# EAGLE board nixie_paneralized (EAGLE 9.1.3)
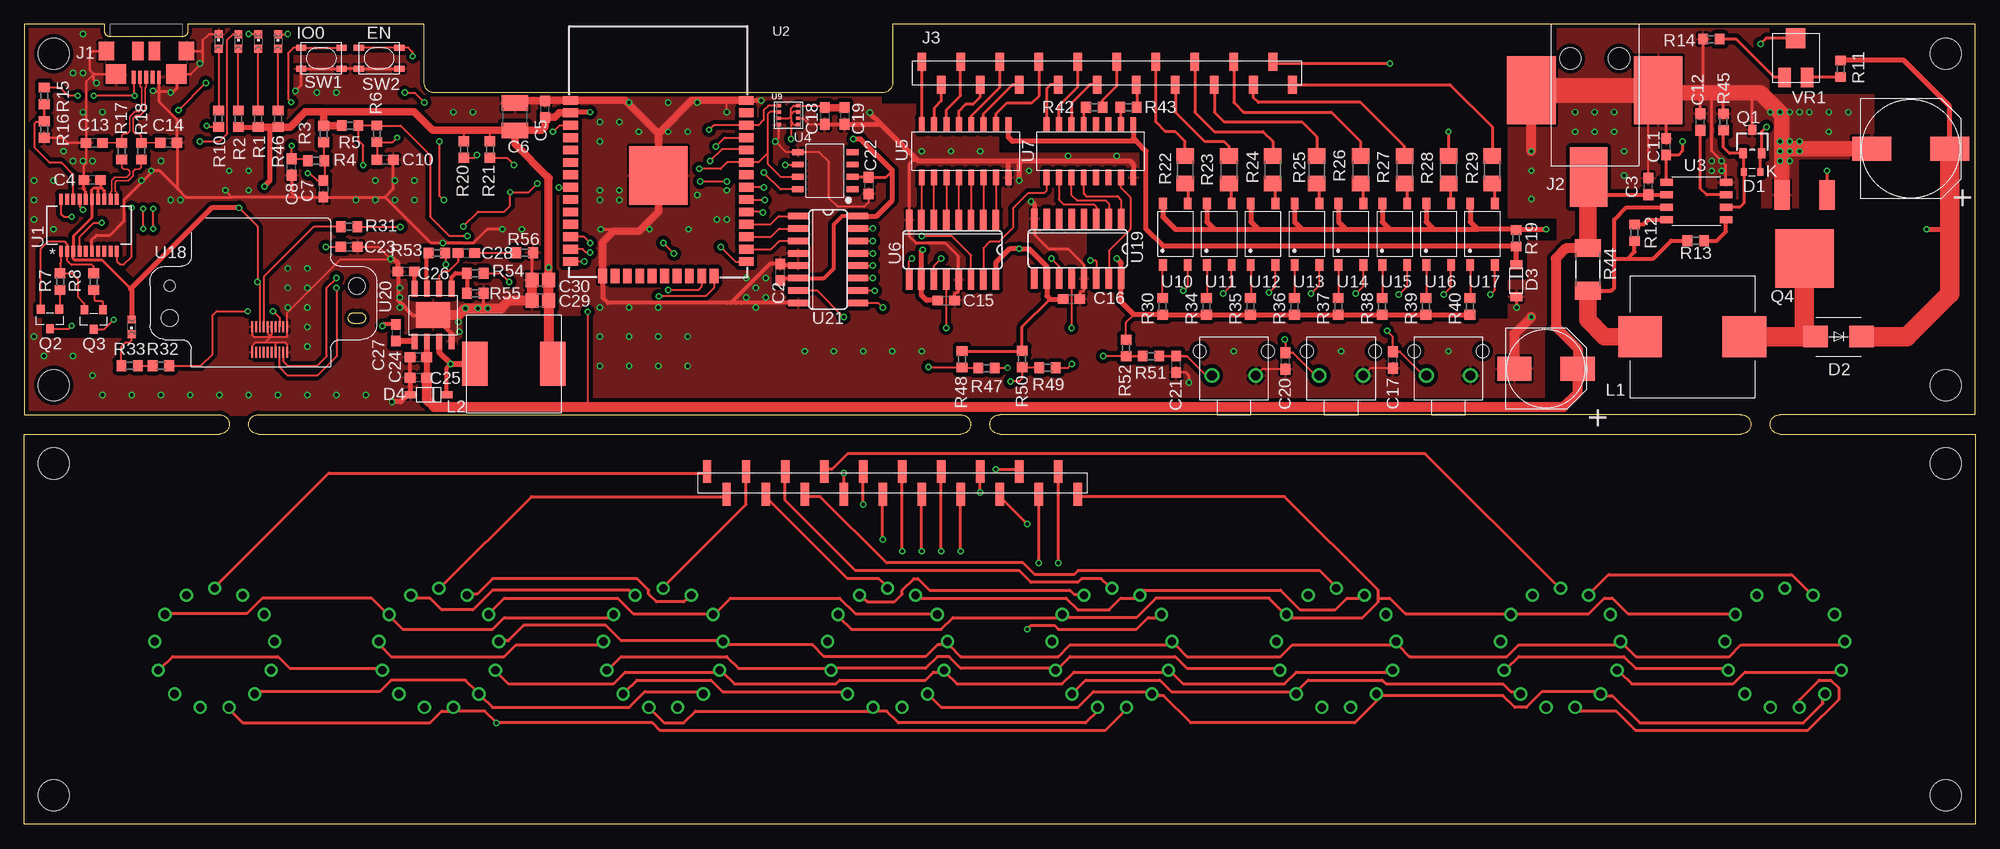
[diagram p0: board, top side]
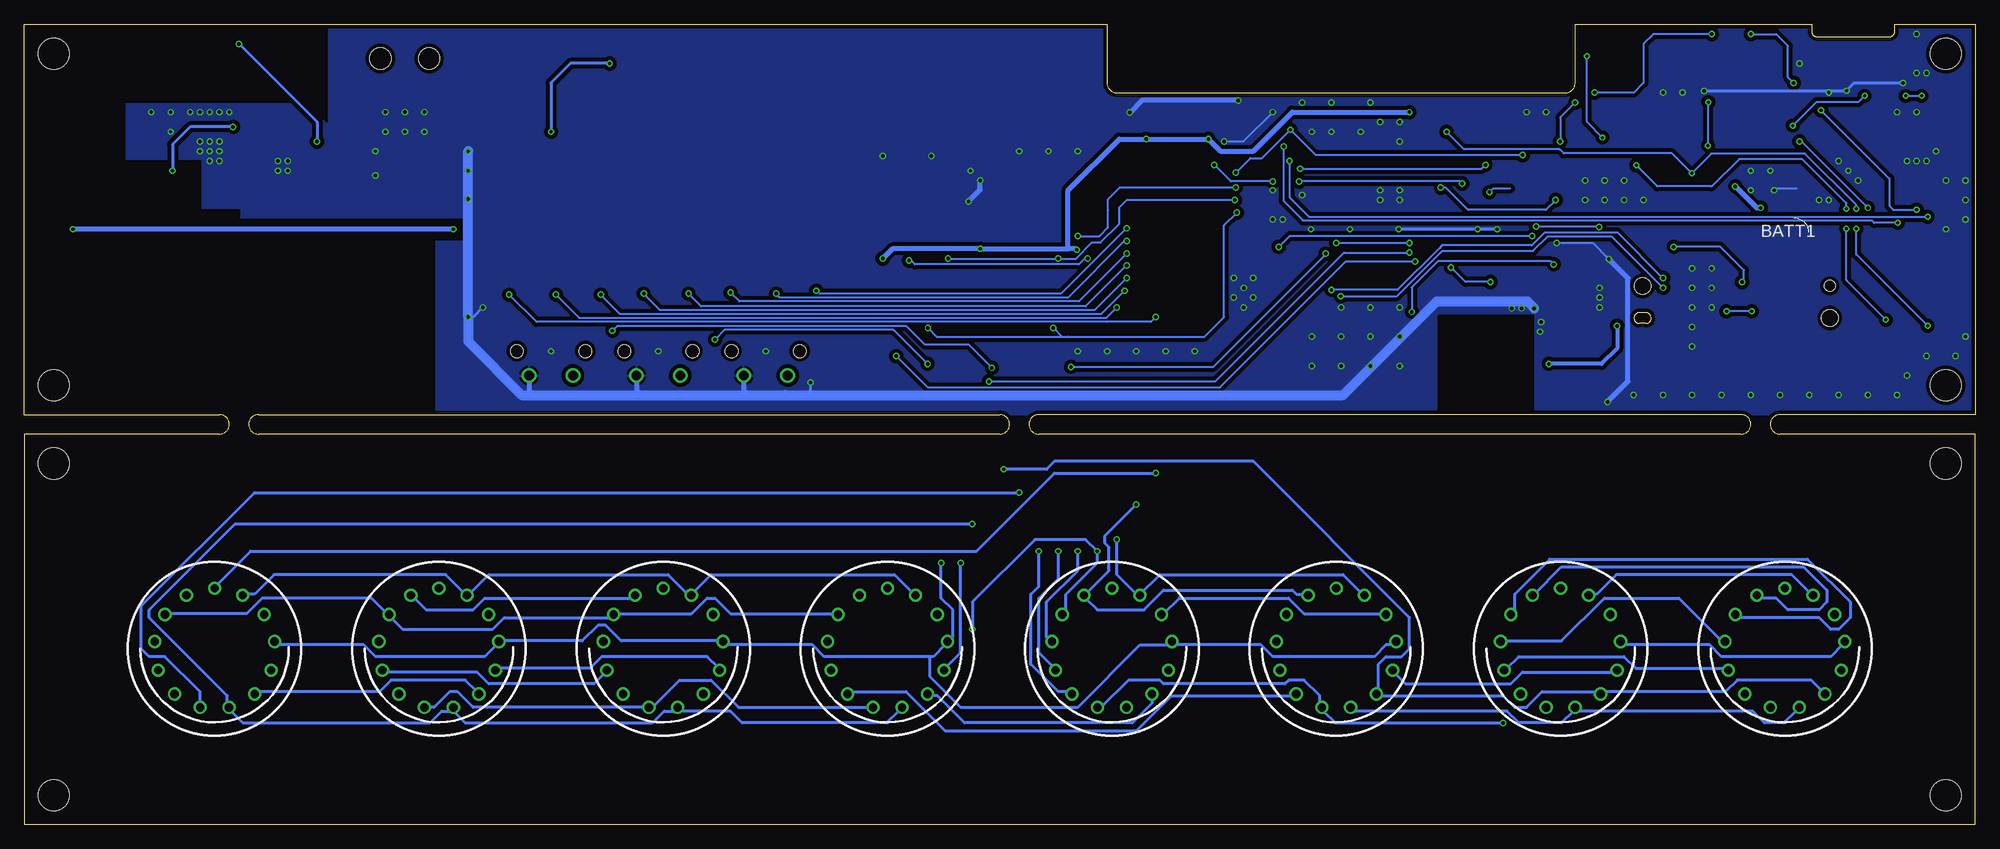
[diagram p1: board, bottom side, seen from below]

Size 200 x 82 mm. Coordinates in mm from the lower left corner, seen from the top.
Outline: 200,0 0,0 0,40 20,40 arc180 20,42 0,42 0,82 8.25,82 8.25,81.25 arc90 8.75,80.75 16.25,80.75 arc90 16.75,81.25 16.75,82 41,82 41,76 arc90 42,75 88,75 arc90 89,76 89,82 200,82 200,42 180,42 arc180 180,40 200,40 200,0
Outline: 24,40 arc-180 24,42 96,42 arc-180 96,40 24,40
Outline: 100,40 arc-180 100,42 176,42 arc-180 176,40 100,40
Copper layers (1*16): Top 0.035mm / dielectric 1.5mm / Bottom 0.035mm
Design rules "Elecrow_2-layer_eagle_rule": minimum track width 6mil, minimum drill 12mil, track to track 6mil, track to pad 6mil, pad to pad 6mil, via to via 6mil, smd to smd 0mil, copper to edge 10mil, drill to drill 10mil, minimum pad ring 10mil, minimum via ring 6mil, stop-mask expansion 2mil, vias tented up to drill 100mil, thermal gap 10mil
Net classes: 0 default: width 0.152 mm; 1 POWER: width 0.254 mm; 2 diffrencial pair: width 0.15 mm, clearance 0.3 mm to class 0, clearance 0.3 mm to class 1, clearance 0.15 mm
Holes 3.2 mm at 197,37 197,3 3,3 3,37 3,79 3,45 197,79 197,45

## Footprints (pad centres in the part's own frame; a part is rotated, then mirrored left to right if it is on the bottom)
NICHICON-ALMINUM-CAPACITOR-8MM = smd 2.5 x 3.5: NEG 0,-3.25; POS 0,3.25
C0603 = smd 1.1 x 1: 1 -0.85,0; 2 0.85,0
C1210 = smd 1.6 x 2.7: 1 -1.4,0; 2 1.4,0
NICHICON-ALMINUM-CAPACITOR-10MM = smd 2.5 x 4: NEG 0,-4; POS 0,4
C2012 = smd 1.3 x 1.5: 1 -0.85,0; 2 0.85,0
EMD2 = smd 0.6 x 0.8: A -0.85,0; K 0.85,0
MKT-DO214AA = smd 2.5 x 2.2: A -2.35,0; K 2.35,0
SOD123 = smd 0.91 x 1.22: A -1.635,0; K 1.635,0
DIODE-ZETEX-SOD123 = smd 1.2 x 0.7: A -1.85,0; K 1.85,0
ZX62R-B-5PA = smd 0.4 x 1.35: D+ 0,2.675; D- 0.65,2.675; GND -1.3,2.675; ID -0.65,2.675; VCC 1.3,2.675 | smd 1.2 x 1.9: NC@1 -0.85,0; NC@2 0.85,0 | smd 2.1 x 2: SHIELD@1 -3.1,2.35; SHIELD@2 3.1,2.35 | smd 1.6 x 1.9: SHIELD@3 -4.1,0; SHIELD@4 4.1,0
2DC-0415D200 = smd 6.1 x 3.8: 1 15.65,-0.63 | smd 7 x 5: 2 6.75,6.5; 3 6.75,-6.5 | hole 2.2: 3.5,2.5; 3.5,-2.5
FSM-21045-20 = smd 0.89 x 1.85: 1 0,1.175; 2 2,-1.175; 3 4,1.175; 4 6,-1.175; 5 8,1.175; 6 10,-1.175; 7 12,1.175; 8 14,-1.175; 9 16,1.175; 10 18,-1.175; 11 20,1.175; 12 22,-1.175; 13 24,1.175; 14 26,-1.175; 15 28,1.175; 16 30,-1.175; 17 32,1.175; 18 34,-1.175; 19 36,1.175; 20 38,-1.175
PSM-210223 = smd 0.85 x 2.35: 1 0,1.175; 2 2,-1.175; 3 4,1.175; 4 6,-1.175; 5 8,1.175; 6 10,-1.175; 7 12,1.175; 8 14,-1.175; 9 16,1.175; 10 18,-1.175; 11 20,1.175; 12 22,-1.175; 13 24,1.175; 14 26,-1.175; 15 28,1.175; 16 30,-1.175; 17 32,1.175; 18 34,-1.175; 19 36,1.175; 20 38,-1.175
CLF12577NI-D = smd 4.5 x 4.2: 1 -5.35,0; 2 5.35,0
NR10050T100M = smd 2.6 x 4.5: P$1 -4,0; P$2 4,0
CHIPLED_0603 = smd 0.8 x 0.8: A 0,-0.75; C 0,0.75
IN-14 = drill 0.84: 0 5.094,-3.516; 1 -5.094,-3.516; 2 -6.145,-0.746; 3 -5.788,2.195; 4 -4.105,4.633; 5 -1.481,6.01; 6 1.481,6.01; 7 4.105,4.633; 8 5.788,2.195; 9 6.145,-0.746; A 0,-6.19; LHDP 2.877,-5.481; RHDP -2.877,-5.481
SOT346 = smd 0.8 x 1: 1 -0.95,-1.2; 2 0.95,-1.2; 3 0,1.2
SOT23 = smd 0.8 x 0.9: B -0.95,-1; C 0,1; E 0.95,-1
2-7K1A = smd 6 x 6: D 0,4 | smd 1.6 x 3: G -2.3,-2.5; S 2.3,-2.5
R0603 = smd 1 x 1.1: 1 -0.85,0; 2 0.85,0
R3216 = smd 1.6 x 1.8: 1 -1.4,0; 2 1.4,0
R5025 = smd 1.8 x 2.7: 1 -2.2,0; 2 2.2,0
SKRPACE010 = smd 1.05 x 0.65: P1 -2.075,-1.075; P2 2.075,-1.075; S1 -2.075,1.075; S2 2.075,1.075
SKHHLPA010 = drill 1: 1 2.25,0; 2 -2.25,0 | hole 1.3: -3.5,2.5; 3.5,2.5
SSOP20_L = smd 0.4 x 1.143: 1 -2.857,-2.68; 2 -2.223,-2.68; 3 -1.587,-2.68; 4 -0.953,-2.68; 5 -0.318,-2.68; 6 0.318,-2.68; 7 0.953,-2.68; 8 1.587,-2.68; 9 2.223,-2.68; 10 2.857,-2.68; 11 2.857,2.68; 12 2.223,2.68; 13 1.587,2.68; 14 0.953,2.68; 15 0.318,2.68; 16 -0.318,2.68; 17 -0.953,2.68; 18 -1.587,2.68; 19 -2.223,2.68; 20 -2.857,2.68
ESP-WROOM-32 = smd 0.9 x 1.5: 1 7.7,9; 2 6.43,9; 3 5.16,9; 4 3.89,9; 5 2.62,9; 6 1.35,9; 7 0.08,9; 8 -1.19,9; 9 -2.46,9; 10 -3.73,9; 11 -5,9; 12 -6.27,9; 13 -7.54,9; 14 -8.81,9; 25 -8.81,-9; 26 -7.54,-9; 27 -6.27,-9; 28 -5,-9; 29 -3.73,-9; 30 -2.46,-9; 31 -1.19,-9; 32 0.08,-9; 33 1.35,-9; 34 2.62,-9; 35 3.89,-9; 36 5.16,-9; 37 6.43,-9; 38 7.7,-9 | smd 1.5 x 0.9: 15 -10.3,5.715; 16 -10.3,4.445; 17 -10.3,3.175; 18 -10.3,1.905; 19 -10.3,0.635; 20 -10.3,-0.635; 21 -10.3,-1.905; 22 -10.3,-3.175; 23 -10.3,-4.445; 24 -10.3,-5.715 | smd 6 x 6: GND 0,0
DMP8 = smd 1.27 x 0.72: 1 -3.05,1.905; 2 -3.05,0.635; 3 -3.05,-0.635; 4 -3.05,-1.905; 5 3.05,-1.905; 6 3.05,-0.635; 7 3.05,0.635; 8 3.05,1.905
SO08 = smd 0.6 x 1.2: 1 -1.905,-2.8; 2 -0.635,-2.8; 3 0.635,-2.8; 4 1.905,-2.8; 5 1.905,2.8; 6 0.635,2.8; 7 -0.635,2.8; 8 -1.905,2.8
R-PDSO-G16 = smd 0.6 x 1.55: 1 0,-2.7; 2 1.27,-2.7; 3 2.54,-2.7; 4 3.81,-2.7; 5 5.08,-2.7; 6 6.35,-2.7; 7 7.62,-2.7; 8 8.89,-2.7; 9 8.89,2.7; 10 7.62,2.7; 11 6.35,2.7; 12 5.08,2.7; 13 3.81,2.7; 14 2.54,2.7; 15 1.27,2.7; 16 0,2.7
SO16 = smd 0.66 x 2.032: 1 -4.445,-3.073; 2 -3.175,-3.073; 3 -1.905,-3.073; 4 -0.635,-3.073; 5 0.635,-3.073; 6 1.905,-3.073; 7 3.175,-3.073; 8 4.445,-3.073; 9 4.445,3.073; 10 3.175,3.073; 11 1.905,3.073; 12 0.635,3.073; 13 -0.635,3.073; 14 -1.905,3.073; 15 -3.175,3.073; 16 -4.445,3.073
LGA-8-2.5X2.5 = smd 0.35 x 0.5: 1 -0.975,1.025; 2 -0.325,1.025; 3 0.325,1.025; 4 0.975,1.025; 5 0.975,-1.025; 6 0.325,-1.025; 7 -0.325,-1.025; 8 -0.975,-1.025
11-4M1S = smd 1.2 x 0.8: 1 -3.15,1.27; 3 -3.15,-1.27; 4 3.15,-1.27; 6 3.15,1.27
GYSFDMAXB = smd 0.2 x 1.14: 1 12.05,-6.82; 2 12.05,-4.18; 3 11.65,-6.82; 4 11.65,-4.18; 5 11.25,-6.82; 6 11.25,-4.18; 7 10.85,-6.82; 8 10.85,-4.18; 9 10.45,-6.82; 10 10.45,-4.18; 11 10.05,-6.82; 12 10.05,-4.18; 13 9.65,-6.82; 14 9.65,-4.18; 15 9.25,-6.82; 16 9.25,-4.18; 17 8.85,-6.82; 18 8.85,-4.18; 19 8.45,-6.82; 20 8.45,-4.18 | hole 1.1: 0,0 | hole 1.7: 0,-3.3; 19.2,0
MP2307 = smd 0.61 x 1.6: 1 -1.905,-2.7; 2 -0.635,-2.7; 3 0.635,-2.7; 4 1.905,-2.7; 5 1.905,2.7; 6 0.635,2.7; 7 -0.635,2.7; 8 -1.905,2.7 | smd 3.51 x 2.62: PAD 0,0
SM-42A = smd 1.3 x 2: 1 1.15,-2; 3 -1.15,-2 | smd 2 x 2: 2 0,2

## Placement (x,y rotation side)
C1  UWT1E221MNL1GS  [NICHICON-ALMINUM-CAPACITOR-8MM]  156,46.7 270 top
C2  0.1uF  [C0603]  77.5,56.6 90 top
C3  0.1uF  [C0603]  166.5,65.4 90 top
C4  0.1uF  [C0603]  6.96,66.05 180 top
C5  0.1uF  [C0603]  53.39,73.31 90 top
C6  100uF  [C1210]  50.3,72.53 90 top
C7  1000pF  [C0603]  30.66,65.15 270 top
C8  1000pF  [C0603]  27.4,67.38 90 top
C9  ULR2D330MML1GS  [NICHICON-ALMINUM-CAPACITOR-10MM]  193.4,69.25 270 top
C10  1000pF  [C0603]  36.98,68.12 180 top
C11  0.1uF  [C0603]  168.32,69.45 90 top
C12  330pF  [C0603]  171.83,72 90 top
C13  47pF  [C0603]  7.17,69.85 180 top
C14  47pF  [C0603]  14.81,69.87 0 top
C15  0.1uF  [C0603]  94.5,53.7 0 top
C16  0.1uF  [C0603]  107.36,53.85 0 top
C17  1000pF  [C0603]  140.3,47.6 90 top
C18  0.1uF  [C0603]  82.05,72.62 270 top
C19  0.1uF  [C0603]  84.09,72.62 270 top
C20  1000pF  [C0603]  129.3,47.5 90 top
C21  1000pF  [C0603]  118.09,47.17 90 top
C22  0.1uF  [C0603]  86.56,65.47 270 top
C23  0.1uF  [C0603]  33.3,59.2 0 top
C24  10uF  [C0603]  40.4,47.87 180 top
C25  10uF  [C0603]  40.4,45.79 180 top
C26  0.1uF  [C0603]  39.15,56.66 180 top
C27  10nF  [C0603]  38.1,50.4 270 top
C28  3.9nF  [C0603]  45.31,58.57 0 top
C29  22μF  [C2012]  52.9,53.7 180 top
C30  22μF  [C2012]  52.9,55.8 180 top
D1  1SS400SM  [EMD2]  177.13,66.87 0 top
D2  S2MS2M  [MKT-DO214AA]  186,50 0 top
D3  MMSZ5267BT1G  [SOD123]  152.95,55.71 90 top
D4  B130LAW-7-F  [DIODE-ZETEX-SOD123]  41.45,44.03 0 top
J1  ZX62R-AB-5P  [ZX62R-B-5PA]  12.5,79.25 180 top
J2  2DC-0415D200  [2DC-0415D200]  161,82 270 top
J3  FSM-21045-20  [FSM-21045-20]  92,77 0 top
J4  PSM-210223  [PSM-210223]  108,35 180 top
L1  CLF12577NIT-221M-D  [CLF12577NI-D]  171,50 0 top
L2  NR10050T100M  [NR10050T100M]  50.2,47.2 0 top
LED1  RX  [CHIPLED_0603]  23.98,80.25 0 top
LED2  TX  [CHIPLED_0603]  21.95,80.25 0 top
LED3  VBUS  [CHIPLED_0603]  19.91,80.26 0 top
LED5  GPS  [CHIPLED_0603]  11,51 180 top
LED6  LED1  [CHIPLED_0603]  26.01,80.25 0 top
N1  IN-14  [IN-14]  180.5,18 180 bottom
N2  IN-14  [IN-14]  157.5,18 180 bottom
N3  IN-14  [IN-14]  134.5,18 180 bottom
N4  IN-14  [IN-14]  111.5,18 180 bottom
N5  IN-14  [IN-14]  88.5,18 180 bottom
N6  IN-14  [IN-14]  65.5,18 180 bottom
N7  IN-14  [IN-14]  42.5,18 180 bottom
N8  IN-14  [IN-14]  19.5,18 180 bottom
Q1  2SA1162  [SOT346]  177.16,69.99 0 top
Q2  MMSS8050-L  [SOT23]  2.63,51.79 180 top
Q3  MMSS8050-L  [SOT23]  7.1,51.74 180 top
Q4  TK7P50D  [2-7K1A]  182.5,62 180 top
R1  1k  [R0603]  23.98,72.32 270 top
R2  1k  [R0603]  21.95,72.32 270 top
R3  10k  [R0603]  30.68,70.76 90 top
R4  470  [R0603]  29.92,68.02 0 top
R5  10k  [R0603]  33.4,71.62 180 top
R6  470  [R0603]  36.14,70.79 90 top
R7  10k  [R0603]  3.66,55.63 90 top
R8  10k  [R0603]  7.11,55.63 90 top
R10  1k  [R0603]  19.91,72.34 270 top
R11  [R0603]  186.21,77.45 90 top
R12  470  [R0603]  165.08,60.65 270 top
R13  1k  [R0603]  171.35,59.83 180 top
R14  [R0603]  172.95,80.49 0 top
R15  4.7k  [R0603]  2.03,74.67 90 top
R16  10k  [R0603]  2.03,71.22 90 top
R17  27  [R0603]  9.97,69 270 top
R18  27  [R0603]  12,69 270 top
R19  220k  [R0603]  152.94,60.09 90 top
R20  4.7k  [R0603]  45.07,69.18 90 top
R21  4.7k  [R0603]  47.73,69.18 90 top
R22  10k  [R3216]  119,67.1 90 top
R23  10k  [R3216]  123.5,67.1 90 top
R24  10k  [R3216]  128,67.1 90 top
R25  10k  [R3216]  132.5,67.1 90 top
R26  10k  [R3216]  137,67.1 90 top
R27  10k  [R3216]  141.5,67.1 90 top
R28  10k  [R3216]  146,67.1 90 top
R29  10k  [R3216]  150.5,67.1 90 top
R30  1k  [R0603]  116.7,53.1 90 top
R31  0  [R0603]  33.3,61.25 0 top
R32  1k  [R0603]  14,47 0 top
R33  0  [R0603]  10.8,47 0 top
R34  1k  [R0603]  121.2,53.1 90 top
R35  1k  [R0603]  125.7,53.1 90 top
R36  1k  [R0603]  130.2,53.1 90 top
R37  1k  [R0603]  134.7,53.1 90 top
R38  1k  [R0603]  139.2,53.1 90 top
R39  1k  [R0603]  143.7,53.1 90 top
R40  1k  [R0603]  148.2,53.1 90 top
R42  1k  [R0603]  109.7,73.5 0 top
R43  1k  [R0603]  113.2,73.5 0 top
R44  0.25  [R5025]  160.3,56.9 270 top
R45  1k  [R0603]  174.2,72 270 top
R46  1k  [R0603]  26.01,72.32 270 top
R47  470  [R0603]  98.64,46.77 180 top
R48  10k  [R0603]  96.12,47.67 90 top
R49  470  [R0603]  104.9,46.8 180 top
R50  10k  [R0603]  102.3,47.7 90 top
R51  470  [R0603]  115.5,48 180 top
R52  10k  [R0603]  112.96,48.83 90 top
R53  100k  [R0603]  42.3,58.57 180 top
R54  26.1k/1%  [R0603]  46.23,56.5 0 top
R55  10k/1%  [R0603]  46.23,54.44 180 top
R56  6.8k  [R0603]  51.3,58.6 180 top
SW1  SKRPACE010  [SKRPACE010]  30.45,78.53 0 top
SW2  SKRPACE010  [SKRPACE010]  36.37,78.53 0 top
SW3  SKHHLPA010  [SKHHLPA010]  146,46 0 top
SW4  SKHHLPA010  [SKHHLPA010]  135,46 0 top
SW5  SKHHLPA010  [SKHHLPA010]  124,46 0 top
U1  FT231XS  [SSOP20_L]  6.61,61.41 0 top
U2  ESP-WROOM-32  [ESP-WROOM-32]  65,66.5 90 top
U3  NJM2360AM  [DMP8]  171.41,63.89 180 top
U4  DS3231M  [SO08]  82.1,67 90 top
U5  SN75468  [R-PDSO-G16]  92,69 0 top
U6  74HC595D  [SO16]  95.15,58.9 180 top
U7  SN75468  [R-PDSO-G16]  104.8,69 0 top
U9  BME280  [LGA-8-2.5X2.5]  78.36,72.7 90 top
U10  TLP188  [11-4M1S]  118,60.5 90 top
U11  TLP188  [11-4M1S]  122.5,60.5 90 top
U12  TLP188  [11-4M1S]  127,60.5 90 top
U13  TLP188  [11-4M1S]  131.5,60.5 90 top
U14  TLP188  [11-4M1S]  136,60.5 90 top
U15  TLP188  [11-4M1S]  140.5,60.5 90 top
U16  TLP188  [11-4M1S]  145,60.5 90 top
U17  TLP188  [11-4M1S]  149.5,60.5 90 top
U18  GYSFDMAXB  [GYSFDMAXB]  14.9,55.2 0 top
U19  74HC595D  [SO16]  108,59 180 top
U20  MP2307  [MP2307]  41.9,52.2 0 top
U21  74HC138D  [SO16]  82.4,57.9 270 top
VR1  SM-42A  [SM-42A]  181.61,78.58 0 top

## Library data of the parts
C1-C30 D3 D4 J1-J4 L2 LED1-LED3 LED5 LED6 N1-N8 R1-R8 R10-R29 R31-R33 R44-R56 SW1-SW5 U2 U5-U7 U10-U21 VR1 = taki-library
D1 = taki-library; STORE: RS; URL: https://jp.rs-online.com/web/p/switching-diodes/8288680/
D2 = taki-library; STORE: RS; URL: https://jp.rs-online.com/web/p/rectifier-schottky-diodes/6708845/
L1 = taki-library; STORE: RS; URL: https://jp.rs-online.com/web/p/wire-wound-surface-mount-inductors/1247777/
Q1 = taki-library; STORE: RS; URL: https://jp.rs-online.com/web/p/bipolar-transistors/6011141/
Q2 Q3 = taki-library; DIGIKEY_URL: https://www.digikey.jp/product-detail/ja/micro-commercial-co/MMSS8050-L-TP/MMSS8050-L-TPMSCT-ND/2827203; MARUTSU_URL: https://www.marutsu.co.jp/pc/i/15861860/; STORE: MARUTSU; URL: https://www.marutsu.co.jp/pc/i/15861860/
Q4 = taki-library; STORE: RS; URL: https://jp.rs-online.com/web/p/mosfet-transistors/7563390/
R30 R34-R40 R42 R43 = 180118 Library by matsu
U1 = taki-library; PROD_ID: IC-11524
U3 = taki-library; STORE: RS; URL: https://jp.rs-online.com/web/p/dc-dc-controllers/7139849/
U4 = taki-library; PROD_ID: IC-11985
U9 = taki-library; PROD_ID: IC-13090

## Nets
+3V3 [POWER]: C2.1 C4.1 C5.1 C6.1 C15.1 C16.1 C18.1 C19.1 C22.1 C23.1 C29.1 C30.1 L2.P$2 LED5.A R1.2 R2.2 R3.2 R5.2 R20.2 R21.2 R30.1 R34.1 R35.1 R36.1 R37.1 R38.1 R39.1 R40.1 R46.2 R48.2 R50.2 R52.2 R54.2 U1.3 U1.13 U1.14 U1.15 U2.2 U4.2 U6.10 U6.16 U9.2 U9.5 U9.6 U9.8 U18.16 U19.10 U19.16 U21.6 U21.16
+12V: C1.POS C3.1 C24.1 C25.1 J2.1 R44.1 R53.1 U3.6 U20.2
+200V: C9.POS D2.K R11.2 R19.2 U10.6 U11.6 U12.6 U13.6 U14.6 U15.6 U16.6 U17.6
ANODE1: J3.13 R22.2
ANODE2: J3.14 R23.2
ANODE3: J3.15 R24.2
ANODE4: J3.16 R25.2
ANODE5: J3.17 R26.2
ANODE6: J3.18 R27.2
ANODE7: J3.19 R28.2
ANODE8: J3.20 R29.2
D2_N [diffrencial pair]: R17.2 U1.12
D2_P [diffrencial pair]: R18.2 U1.11
D_N [diffrencial pair]: C13.1 J1.D- R17.1
D_P [diffrencial pair]: C14.1 J1.D+ R18.1
DTR: Q3.E R7.2 U1.1
EN: C7.1 Q2.C R3.1 R4.2 U2.3
GND: C1.NEG C2.2 C3.2 C4.2 C5.2 C6.2 C7.2 C8.1 C9.NEG C10.1 C11.2 C12.2 C13.2 C14.2 C15.2 C16.2 C17.1 C18.2 C19.2 C20.1 C21.1 C22.2 C23.2 C24.2 C25.2 C26.2 C29.2 C30.2 D3.A D4.A J1.GND J1.SHIELD@1 J1.SHIELD@2 J1.SHIELD@3 J1.SHIELD@4 J2.2 J2.3 LED3.C Q1.3 Q4.S R14.1 R16.1 R45.1 R55.1 R56.1 SW1.P1 SW1.P2 SW2.P1 SW2.P2 SW3.1 SW4.1 SW5.1 U1.6 U1.16 U2.1 U2.15 U2.38 U2.GND U3.4 U4.5 U5.8 U6.8 U6.13 U7.8 U9.1 U9.7 U18.1 U18.2 U18.7 U18.10 U18.12 U18.19 U18.20 U19.8 U19.13 U20.4 U20.PAD U21.4 U21.5 U21.8
GND1: LED6.C U2.8
GPS_RX: U2.23 U18.3
GPS_TX: U2.24 U18.5
IO0: Q3.C R5.1 R6.2 U2.25
N$1: D3.K R19.1 U5.9 U7.9
N$2: R15.1 R16.2 U1.18
N$3: J3.1 U5.16
N$4: LED1.C U1.17
N$5: LED2.C U1.10
N$6: C8.2 R4.1 SW1.S1 SW1.S2
N$7: LED1.A R1.1
N$8: LED2.A R2.1
N$9: Q2.B R7.1
N$10: Q3.B R8.1
N$11: R53.2 U20.7
N$12: C10.2 R6.1 SW2.S1 SW2.S2
N$13: LED3.A R10.1
N$14: D1.K Q1.2 Q4.G
N$15: D1.A Q1.1 R45.2 U3.2
N$16: D2.A L1.2 Q4.D
N$17: U6.15 U7.1
N$18: R11.1 VR1.1
N$19: R12.1 U3.8
N$20: R13.1 U3.1
N$21: R14.2 VR1.3
N$22: U5.7 U6.1
N$23: C11.1 U3.5 VR1.2
N$24: C12.1 U3.3
N$25: U5.6 U6.2
N$26: U5.5 U6.3
N$27: R31.1 U18.14
N$28: R22.1 U10.4
N$29: R23.1 U11.4
N$30: R24.1 U12.4
N$31: R25.1 U13.4
N$32: R26.1 U14.4
N$33: R27.1 U15.4
N$34: R28.1 U16.4
N$35: R29.1 U17.4
N$36: R30.2 U10.1
N$37: R32.2 U18.6
N$38: LED5.C R33.1
N$39: R32.1 R33.2
N$40: U5.4 U6.4
N$41: U5.3 U6.5
N$42: U5.2 U6.6
N$43: U5.1 U6.7
N$44: U6.9 U19.14
N$45: U7.7 U19.15
N$46: U7.4 U19.1
N$47: U7.3 U19.2
N$48: U7.2 U19.3
N$49: U2.30 U6.11 U19.11
N$50: U10.3 U21.15
N$51: R34.2 U11.1
N$52: R35.2 U12.1
N$53: R36.2 U13.1
N$54: R37.2 U14.1
N$55: R38.2 U15.1
N$56: R39.2 U16.1
N$57: R40.2 U17.1
N$58: U11.3 U21.14
N$59: U12.3 U21.13
N$60: U13.3 U21.12
N$61: U14.3 U21.11
N$62: U15.3 U21.10
N$63: U16.3 U21.9
N$64: U17.3 U21.7
N$65: J3.2 U5.15
N$66: J3.3 U5.14
N$67: J3.4 U5.13
N$68: J3.5 U5.12
N$69: J3.6 U5.11
N$70: J3.7 U5.10
N$71: J3.8 U7.16
N$72: J3.9 U7.15
N$73: J3.10 U7.14
N$74: J3.11 R42.2
N$75: J3.12 R43.2
N$76: C26.1 U20.8
N$77: U2.29 U6.12 U19.12
N$78: U2.31 U6.14
N$79: R42.1 U7.13
N$80: R43.1 U7.10
N$81: L1.1 R12.2 R13.2 R44.2 U3.7
N$82: U2.28 U21.1
N$83: U2.27 U21.2
N$84: U2.26 U21.3
N$86: C20.2 R49.1 SW4.2
N$87: C17.2 R47.1 SW3.2
N$88: J4.1 N1.1 N2.1 N3.1 N4.1 N5.1 N6.1 N7.1 N8.1
N$89: J4.3 N1.3 N2.3 N3.3 N4.3 N5.3 N6.3 N7.3 N8.3
N$90: C21.2 R51.1 SW5.2
N$91: J4.4 N1.4 N2.4 N3.4 N4.4 N5.4 N6.4 N7.4 N8.4
N$92: J4.5 N1.5 N2.5 N3.5 N4.5 N5.5 N6.5 N7.5 N8.5
N$93: J4.7 N1.7 N2.7 N3.7 N4.7 N5.7 N6.7 N7.7 N8.7
N$94: LED6.A R46.1
N$95: J4.8 N1.8 N2.8 N3.8 N4.8 N5.8 N6.8 N7.8 N8.8
N$96: J4.9 N1.9 N2.9 N3.9 N4.9 N5.9 N6.9 N7.9 N8.9
N$97: J4.12 N1.LHDP N2.LHDP N3.LHDP N4.LHDP N5.LHDP N6.LHDP N7.LHDP N8.LHDP
N$98: J4.11 N1.RHDP N2.RHDP N3.RHDP N4.RHDP N5.RHDP N6.RHDP N7.RHDP N8.RHDP
N$99: J4.2 N1.2 N2.2 N3.2 N4.2 N5.2 N6.2 N7.2 N8.2
N$100: J4.6 N1.6 N2.6 N3.6 N4.6 N5.6 N6.6 N7.6 N8.6
N$101: J4.10 N1.0 N2.0 N3.0 N4.0 N5.0 N6.0 N7.0 N8.0
N$102: J4.13 N1.A
N$103: J4.14 N2.A
N$104: J4.15 N3.A
N$105: J4.16 N4.A
N$106: J4.17 N5.A
N$107: J4.18 N6.A
N$108: J4.19 N7.A
N$109: J4.20 N8.A
N$110: C27.2 U20.1
N$111: C27.1 D4.K L2.P$1 U20.3
N$112: R54.1 R55.2 U20.5
N$113: C28.1 U20.6
N$114: C28.2 R56.2
RTS: Q2.E R8.2 U1.2
RXD: U1.4 U2.35
SCL: R20.1 U2.36 U4.8 U9.4
SDA: R21.1 U2.33 U4.7 U9.3
SW3: R47.2 R48.1 U2.12
SW4: R49.2 R50.1 U2.13
SW5: R51.2 R52.1 U2.14
TXD: U1.20 U2.34
VBATT: R31.2 U4.6
VBUS: J1.VCC R10.2 R15.2

## Tracks (layer width: path | path; a pad name or v marks a point on that pad's centre or on a via)
+3V3  (via drill 0.35)
  Top 0.203: U9.2 77.36,72.4 78.4,72.4 78.6,72.6 | 78.6,72.6 78.6,72.8 | 78.6,72.8 78.6,73.4 78.88,73.68 U9.5 81.85,73.68 C18.1 | U9.6 78.83,73.03 78.6,72.8 | 78.6,72.6 78.6,72 | U9.8 78.87,71.73 78.6,72 | U18.16 24.15,55.35 v23.9,55.6 23.9,61.3 v22,63.2 | v30.9,59.2 C23.1 | 78.6,72 v78.6,70.25 | R52.2 112.96,51.46 113.75,52.25 | 86.51,66.36 C22.1 | R20.2 45.07,71.07 45,71.13 | R21.2 47.73,71.11 47.7,71.13 | R54.2 48.8,56.5 v49.7,55.6
  Top 0.305: 7.52,65.23 7.11,65.23 6.93,65.05 U1.15 6.93,62.2 5.02,60.3 U1.3 5.02,57.98 5.2,57.8 8,57.8 10.9,54.9 11,54.8 | 7.52,65.23 7.72,65.23 | 7.72,65.23 7.92,65.23 8.2,64.96 U1.13 | U1.14 7.56,65.19 7.52,65.23 | C4.1 7.81,65.32 7.72,65.23 | U19.16 112.44,56 112.44,57.55 | 56.07,73 U2.2 | 91.97,56 U6.10 | R46.2 | R48.2 102.27,48.52 R50.2 102.3,51 105.15,53.85 | U4.2 86.51,66.36 C22.1 88.32,66.32 89,67
  Top 0.406: C2.1 77.75,55.99 U21.6 82,56 83,57 83,61.5 83.75,62.25 83.84,62.34 U21.16
  Top 0.508: v24.6,65.4 25.2,66 25.2,71.42 25.25,71.47 | v22,63.2 19.2,63.2 10.9,54.9 | 11,54.8 LED5.A | R40.1 R39.1 R38.1 R37.1 R36.1 R35.1 R34.1 R30.1 113.75,52.25 112.44,53.55 112.44,56 | U19.16 112.44,57.55 v112,58 | v58,73 56.07,73 | U6.16 99.59,57.59 101,59 v102,59 103,59 104.83,57.17 U19.10 104.83,54.17 105.15,53.85 C16.1 | v92.1,58.9 91.97,58.77 91.97,56 | C15.1 92.5,53.7 91.97,54.23 U6.10 | R2.2 R1.2 | v85,70.25 85.75,70.25 89,67 89,64 87.5,62.5 87.34,62.34 U21.16
  Top 0.762: 30.68,73.03 28.81,73.03 27.25,71.47 R46.2 25.25,71.47 R1.2 | U2.2 54.83,72.93 54.36,72.46 C5.1 53.39,71.49 53.03,71.13 C6.1 | 30.68,73.03 39.97,73.03 41.87,71.13 44,71.13 45,71.13 46.2,71.13 47.7,71.13 C6.1 | 30.68,73.03 R3.2 30.7,71.62 R5.2 | C19.1 C18.1 | C6.1 50.3,69.7 53.66,66.34
  Top 0.813: C30.1 v53.75,57.1 53.75,66.25 53.66,66.34
  Top 1: L2.P$2 53.75,47.65 C29.1 C30.1
  Bottom 0.203: v23.9,55.6 23.7,55.8 23.7,56.8 26.1,59.2 v30.9,59.2 | v49.7,55.6 52.25,55.6 v53.75,57.1
  Bottom 0.508: v24.6,65.4 22.4,63.2 v22,63.2 | v112,58 111,59 v102,59 93,59 | 93,59 93,65 87.75,70.25 v85,70.25 v78.6,70.25 77.35,69 74,69 70,73 v58,73 | v92.1,58.9 92.2,59 93,59
+12V  (via drill 0.35)
  Top 0.203: 166,64.53 166.5,64.53 | 43.2,58.52 v43.2,57.4 | v57.75,52.54 57.75,42.8
  Top 0.305: 166.5,64.53 C3.1
  Top 0.406: J2.1 162.19,64.53 166,64.53 U3.6 | R53.1 43.2,58.52
  Top 0.6: U20.2 41.27,47.88 C24.1 C25.1
  Top 1: R44.1 158.1,59.1 157,58 157,51 159.25,48.75 C1.POS 159.25,44.25 157.8,42.8 57.75,42.8 56.6,42.8 56.2,42.8 42,42.8 41.25,43.55 C25.1
  Top 1.8: R44.1 160.3,66.28 J2.1
  Bottom 0.203: v57.75,52.54 57.75,55.05 55.1,57.7 43.5,57.7 v43.2,57.4
+200V  (via drill 0.35)
  Top 0.508: U10.6 116.73,62.27 118,61 122,61 | 122,61 126.5,61 | 126.5,61 131,61 | 131,61 135.5,61 | 135.5,61 140,61 | 140,61 144.5,61 | 144.5,61 149,61 | U11.6 121.23,61.77 122,61 | U12.6 125.73,61.77 126.5,61 | U13.6 130.23,61.77 131,61 | U14.6 134.73,61.77 135.5,61 | U15.6 139.23,61.77 140,61 | U16.6 143.73,61.77 144.5,61 | U17.6 148.23,61.77 149,61 | 153.01,61 149,61 | R19.2 153.01,61 | 153.01,61 v156,61 | v195,61 197.4,61 | C9.POS 197.4,73.6 192.7,78.3 R11.2
  Top 2: D2.K 193,50 197.4,54.4 197.4,61 C9.POS
  Bottom 0.508: v156,61 v195,61
ANODE1
  Top 0.305: R22.2 119,70 118,71 117,71 116,72 J3.13
ANODE2
  Top 0.305: J3.14 118,73 121,70 123,70 123.5,69.5 R23.2
ANODE3
  Top 0.305: J3.15 120,73 122,71 127,71 128,70 R24.2
ANODE4
  Top 0.305: J3.16 122,73 123,72 131,72 132.5,70.5 R25.2
ANODE5
  Top 0.305: J3.17 124,74 125,73 134,73 137,70 R26.2
ANODE6
  Top 0.305: R27.2 141.5,69.5 137,74 126.5,74 126,74.5 J3.18
ANODE7  (via drill 0.35)
  Top 0.305: J3.19 128.18,78 v140,78 | v146,71 R28.2
  Bottom 0.305: v140,78 144,78 146,76 v146,71
ANODE8
  Top 0.305: J3.20 146.18,75.83 150.5,71.5 R29.2
D2_N
  Top 0.152: U1.12 8.83,64.78 8.97,64.92 8.97,65.33 8.97,66.01 9.27,66.31 10.16,66.31 10.49,66.31 10.79,66.62 10.79,66.95 10.59,67.15 10.16,67.15 9.97,67.34 R17.2
D2_P
  Top 0.152: U1.11 9.47,64.77 9.32,64.92 9.32,65.86 9.42,65.96 10.64,65.96 11.15,66.47 11.15,66.95 11.35,67.15 11.79,67.15 12,67.37 R18.2
D_N
  Top 0.152: J1.D- 11.85,75.65 12.01,75.48 12.01,74.47 12.01,73.32 11.86,73.17 11.71,73.02 11.58,73.02 11.31,73.02 11.05,72.77 10.79,72.51 10.79,71.04 10.57,70.81 10.16,70.81 9.97,70.63 R17.1 C13.1
D_P
  Top 0.152: J1.D+ 12.5,75.61 12.37,75.48 12.37,73.18 11.86,72.67 11.45,72.67 11.15,72.36 11.15,71.04 11.38,70.81 11.79,70.81 11.99,70.61 11.99,69.86 R18.1 13.96,69.85 C14.1
DTR
  Top 0.203: Q3.E 6.15,53.39 5.49,54.06 5.49,55.89 4.89,56.48 R7.2 3.66,57.51 3.75,57.61 U1.1
EN  (via drill 0.3, 0.35)
  Top 0.203: R3.1 30.68,68.1 R4.2 30.77,66.11 C7.1 | Q2.C 4.57,50.79 v4.88,51.1 | v12.19,61.06 v12.19,63.09 | v29.06,66.75 29.26,66.75 30,66.01 C7.1 | U2.3 54.86,71.66 v54.2,71 | C7.1
  Bottom 0.203: v4.88,51.1 12.19,58.42 v12.19,61.06 | v54.2,71 52.4,69.2 42.6,69.2 42.18,68.78 31.09,68.78 v29.06,66.75 27.06,68.75 17.45,68.75 12.19,63.49 v12.19,63.09
GND  (via drill 0.35)
  Top 0.203: U9.7 79.82,72.38 80.43,71.77 C18.2 | v20.6,65 21.3,64.3 21.4,64.3 | U18.19 23.35,49.05 23.7,49.4 24.7,49.4 | 24.7,49.4 25.9,49.4 | 25.9,49.4 26.7,49.4 26.95,49.15 U18.1 | U18.7 25.75,49.25 25.9,49.4 | U18.20 23.35,50.15 23.5,50 25.1,50 | 25.1,50 25.3,50 | 25.3,50 26.9,50 26.95,50.05 U18.2 26.95,52.45 32.45,57.95 v37.55,57.95 36.3,59.2 C23.2 | 25.3,50 24.7,49.4 | U18.12 24.95,50.35 25.3,50 | U18.10 25.35,50.25 25.1,50 | U9.1 77.34,70.34 v77,70 78.09,68.91 U4.5 81.5,68.91 82.5,67.9 82.5,64.2 83.4,63.3 86.1,63.3 86.56,63.76 C22.2 | v72,73 72,74.2 | 172.1,75.1 172,75 | C3.2 166.5,74.25 J2.2 | C17.1 138,46.75 SW4.1 | C20.1 126.9,46.65 SW5.1
  Top 0.254: 13.8,75 13.8,75.08 | 15.65,72.2 15.65,72.22 | J1.SHIELD@1 17.06,76.9 18.29,78.13 18.29,79.35 | LED3.C 18.94,81.01 18.29,80.36 18.29,79.35 | J1.SHIELD@3 18.19,79.25 18.29,79.35 | J1.SHIELD@2 7.12,76.9 | 7.12,76.9 6.71,77.31 6.71,78.94 7.02,79.25 J1.SHIELD@4 | C4.2 6.11,67.57 6.32,67.78 C13.2 | C13.2 6.32,76.1 7.12,76.9 | C13.2 4.42,69.84 3.9,70.37 R16.1 | C21.1 119.08,46.32 119.4,46 v119.4,45.3
  Top 0.305: U1.16 6.29,64.83 6.1,65.03 6.1,66.03 C4.2 | SW2.P2 SW2.P1 SW1.P2 SW1.P1 28.38,75.79 v27.78,75.19 | C8.1 27.4,64.75 27.85,64.3 | 36.97,64.3 C7.2 27.85,64.3 | C10.1 37.83,65.16 36.97,64.3 | 36.97,64.3 41.7,59.57 42.87,59.57 v42.9,59.6 46.06,59.6 46.08,59.62 47.46,61 v49,61 | U1.6 6.93,59.93 7.4,60.4 8.8,60.4 10.2,61.8 10.2,64 13.2,67 13.86,67 15.65,65.2 | 15.65,65.2 16.56,64.3 21,64.3 21.4,64.3 27.85,64.3 | 15.65,65.2 C14.2 15.65,72.2 | 15.65,72.22 13.8,74.08 13.8,75 | 13.8,75.08 J1.GND | 13.8,75.08 15.24,75.08 15.6,75.44 J1.SHIELD@1 | 13.8,75.08 13.32,75.08 v13.2,75.2 | v7.4,76 7.12,76.28 7.12,76.9 | U19.8 103.56,60.45 105,59 107,59 108.64,57.37 U19.13 108.64,54.77 108.46,54.6 108.34,54.6 108.21,54.47 C16.2 | C11.2 168.32,74.43 167.75,75 | 172,75 171.83,74.83 C12.2 | R45.1 174.2,74.8 174,75 | U3.4 174.46,67.54 173,69 173,75 | Q1.3 177.16,74.84 177,75 | R14.1 172.1,75.1 | D3.A 152.95,53.05 v153,53 | C15.2 95.35,54.35 95.5,54.5 95.6,54.5 95.78,54.69 U6.13 95.78,58.22 94.4,59.6 91.4,59.6 90.7,60.3 U6.8 90.7,67.7 91,68 91.6,68 | v45.2,52.9 46.7,52.9 47.1,53.3 47.08,53.32 R55.1 | C30.2 52.05,58.5 R56.1 | v59.1,61 60.8,61 61,60.8
  Top 0.406: C18.2 C19.2 | U21.8 73.45,53.45 73,53.45 72,53.45 | 72,53.45 59.83,53.45 59.28,54 | C26.2 38.3,53.7 39.8,52.2 U20.PAD 43.8,50.3 | 43.8,50.3 U20.4 43.8,50.3 | C25.2 C24.2 | U21.5 77.69,57.27 C2.2 76.45,57.45 72.45,53.45 72,53.45 | D4.A 39.33,44.03 39.15,43.85
  Top 0.508: U2.15 59.28,54 | U5.8 100.89,67.89 101,68 | C19.2 87.83,71.77 | 101,68 91.6,68 87.83,71.77 | 101,68 102,68 | 102,68 113.35,68 113.69,67.66 U7.8 | v103.2,63.85 103.56,63.49 U19.8 | v102,66 102,68 | U2.38 v75.57,74.2 | v86.67,72.95 87.83,71.79 87.83,71.77 | C25.2 39.55,44.25 39.15,43.85 38.6,43.3 v37.7,43.3 | C26.2 38.3,57.5 37.85,57.95 v37.55,57.95
  Top 0.762: C6.2 50.53,74.16 C5.2 53.39,74.2 U2.1 61.6,74.2 65,70.8 | 65,70.8 U2.GND 65,62.8 63,60.8 61,60.8 60.4,60.8 59.28,59.69 U2.15 | U2.38 72,74.2 68.4,74.2 65,70.8
  Top 1: U20.PAD 44.5,52.2 v45.2,52.9 48.9,52.9 49.7,53.7 C29.2 C30.2 | v154.5,52 152.75,50.25 C1.NEG
  Top 1.016: v154.5,69 J2.3
  Top 1.6: J2.2 167.75,75 172,75 173,75 174,75 177,75 178,75 180.2,72.8 180.2,70 | 180.2,70 Q4.S | C9.NEG 180.95,69.25 180.2,70
  Top 2.54: J2.3 J2.2
  Bottom 0.203: v77,70 75,70 v72,73 | v42.9,59.6 39.2,59.6 v37.55,57.95 | v20.6,65 20.41,65.19 18.29,65.19
  Bottom 0.254: v119.4,45.3 119.4,44.1 119.5,44
  Bottom 0.305: v7.4,76 12.4,76 v13.2,75.2 v27.77,75.2 v27.78,75.19 | v153,53 154,52 v154.5,52 | v49,61 v59.1,61
  Bottom 0.508: v103.2,63.85 102,65.05 v102,66 | v75.57,74.2 85.42,74.2 v86.67,72.95 | SW5.1 126.25,44.25 126,44 | SW4.1 137.25,44.25 137,44 | SW3.1 148.25,44.25 148,44 | v37.7,43.3 35.6,45.4 35.6,56 v37.55,57.95
  Bottom 1: v45.2,52.9 45.9,53.6 55.2,53.6 64.8,44 119.5,44 122,44 126,44 137,44 148,44 149,44 154.5,49.5 v154.5,52
  Bottom 1.016: v154.5,52 v154.5,69
  other vias: 59,65 72,65 59,64 72,62 71,62 69,64.5 68,71 59,53 62,53 65,53 65,50 62,50 59,50 59,47 62,47 65,47 68,47 68,50 74,54 80,48.5 83,48.5 86,48.5 89,48.5 92,48.5 59,70 59,72 61,72 62,74 66,74 69,74 66,71 63,71 64.1,61 68.1,61 40,66 38,66 36,66 36,64 38,64 40,64 34,64 44,73 46,73 30,75 32,75 21,67 23,67 23,65 1,66 1,64 1,62 8,44 11,44 14,44 17,44 20,44 23,44 26,44 29,44 32,44 35,44 7,46 5,48 2,48 6,73 8,73 5,77 6,77 6,81 18,78 15,75 92,69 95,69 98,69 103,67 107,68.5 112,68.5 124,48.5 135,48.5 146,48.5 154.5,67 154.5,64.1 187,73 185,73 183,73 181,73 185,71 179,73 74,56 76,56 76,54 75,53 75,55 16,64 15,64 12,66 14,68 13,67 5,68 6,68 7,68 4,69 3,66 3,61 1,50 173,68 173,67 174,67 174,68 159,73 161,73 163,73 163,71 161,71 159,71 27,55 29,55 29,53 29,57 27,57 27,53 29,51 29,49 164,69 164,66.5 61,65 61,64 51,61 180,70 182,70 180,68 181,68 181,69 180,69 181,70 182,69 180,73 182,73 38.5,55 38.5,54 38.5,53 46.5,52.9 47.5,52.9 44.6,50.5 44.5,51.5
  pour Bottom (isolate 0.4): 0,82 0,42 146,42 200,42 200,82
  pour Top (isolate 0.4): 0,82 0,42 200,42 200,82
  cutout Top: 88,82 88,74 115,74 115,66 113,66 113,61 109,61 109,58 113,58 113,54 115,52 152,52 152,74 157,74 157,82
  cutout Top: 43,49 42,49 42,44 42,42 57,42 57,52 45,52 45,50 45,49
  pour Top (no thermals): 39,53.5 45,53.5 45,50 44.5,50 44,49.5 43.8,49.5 43.8,50.3 43.2,50.9 39.1,50.9 39.1,52.2 39,52.3 39,53
  cutout Top (no thermals): 156,51 156,42 158,42 158,51
  cutout Top: 169,71 169,62 166,62 166,58 178,58 178,69 176,69 176,64 173,64 172,65 172,71
  cutout Bottom: 45.3,52.2 45.3,42.2 55.1,42.2 55.1,52 55,52.1 55,52.2
  cutout Top: 152,62 152,60 157,60 157,62
  cutout Bottom: 158,60 155,60 155,62 178,62 178,60
  cutout Top: 100,71 100,69 115,69 115,71
  cutout Top: 152,56 154,56 154,60 152,60
  cutout Top: 2,50 2,57 10,57 11,56 11,50
GND1  (via drill 0.35)
  Top 0.203: LED6.C | LED6.C v27,81 | v39,75 40,75 v41,74 | v42.54,69.99 42.54,64.46 v43,64 | v54.78,65.28 55.97,65.28 U2.8
  Bottom 0.203: v27,81 33,81 34,80 34,76 35,75 v39,75 | v41,74 42.54,72.46 v42.54,69.99 | v43,64 44,63 52,63 54.28,65.28 v54.78,65.28
GPS_RX  (via drill 0.35)
  Top 0.203: U18.3 26.55,47.45 27,47 30,47 | 30,47 | 30,47 31,48 31,50 31,55 v32,56 | v66,54.79 69.13,54.79 69.48,55.14 69.48,56.16 U2.23
  Bottom 0.203: v32,56 36.65,60.65 44.16,60.65 45.47,59.34 54.66,59.34 55,59 | 55,59 | 55,59 59.21,54.79 v66,54.79
GPS_TX  (via drill 0.35)
  Top 0.203: U2.24 70.72,55.02 69.83,54.14 v65.03,54.14 | v32,55 32,48 30,46 27,46 26.15,46.85 U18.5
  Bottom 0.203: v65.03,54.14 59.27,54.14 54.62,58.79 45.32,58.79 43.83,60.28 37.28,60.28 v32,55
IO0  (via drill 0.3, 0.35)
  Top 0.203: 34.26,71.64 R6.2 38.56,71.64 41.6,68.6 41.6,62.3 43.6,60.3 v45.4,60.3 | 34.26,71.64 R5.1 | Q3.C 8.18,50.74 v9.14,51.71 | v13.21,61.06 v13.21,63.09 | v34.75,67.56 34.75,69.59 34.26,70.08 34.26,71.64 | v71.4,59.2 72.91,57.69 U2.25
  Bottom 0.203: v9.14,51.71 13.21,55.77 v13.21,61.06 | v13.21,63.09 13.21,63.69 17.72,68.2 24.2,68.2 27,65.4 32.6,65.4 32.73,65.54 v34.75,67.56 | v71.4,59.2 70.3,60.3 45.5,60.3 v45.4,60.3
N$1
  Top 0.508: 114,70 115,69 115,61 116.76,59.24 R19.1 152.95,59.23 D3.K | U5.9 100.89,70.41 101.3,70 114,70 | U7.9 113.69,70.31 114,70
N$2
  Top 0.152: 1.19,72.01 1.22,72.03
  Top 0.203: U1.18 5.02,66.6 3.82,67.8 2.6,67.8 1.02,69.39 1.02,71.83 1.19,72.01 | R16.2 2,72.03 1.22,72.03
  Top 0.254: R16.2 R15.1
N$3
  Top 0.305: J3.1 92,75 U5.16
N$4  (via drill 0.35)
  Top 0.152: v23,81
  Top 0.203: LED1.C v23,81 | U1.17 5.66,63.34 v6,63 | v15.8,73.2 v18.6,76
  Bottom 0.203: v23,81 20.4,81 19.2,79.8 19.2,76.6 v18.6,76 | v15.8,73.2 8.8,66.2 8.8,63.4 8.4,63 v6,63
N$5  (via drill 0.35)
  Top 0.203: U1.10 9.47,57.73 9.8,57.4 10.2,57.4 11,58.2 v11,63.2 | LED2.C 21.4,81 20.8,80.4 20.8,70.8 20,70 v18,70
  Bottom 0.203: v18,70 17.8,70 v11,63.2
N$6  (via drill 0.3)
  Top 0.203: R4.1 28.86,68.23 C8.2 27.4,69.56 v27.38,69.58 | SW1.S2 SW1.S1 27.61,79.61 27.04,79.04 27.04,75 27.04,74.36 v27.36,74.04
  Bottom 0.203: v27.36,74.04 27.36,69.6 v27.38,69.58
N$7
  Top 0.203: R1.1 LED1.A
N$8
  Top 0.203: R2.1 LED2.A
N$9
  Top 0.203: Q2.B 3.66,52.86 R7.1
N$10
  Top 0.203: R8.1 7.18,54.71 7.18,53.78 7.32,53.65 7.92,53.65 8.05,53.52 Q3.B
N$11
  Top 0.406: U20.7 41.27,58.38 R53.2
N$12  (via drill 0.3)
  Top 0.203: C10.2 36.14,68.13 R6.1 37.73,69.94 v38.2,70.41 | v39.83,78.74 39.83,79.14 39.36,79.61 SW2.S2 SW2.S1
  Bottom 0.203: v38.2,70.41 39.83,72.03 v39.83,78.74
N$13
  Top 0.203: LED3.A R10.1
N$14  (via drill 0.35)
  Top 0.305: D1.K 177.98,68.66 Q1.2 178.11,71.01 v178.6,71.5 | v184.8,67 Q4.G
  Bottom 0.305: v178.6,71.5 183,71.5 184.8,69.7 v184.8,67
N$15
  Top 0.305: U3.2 175.85,63.26 176.28,63.68 D1.A 176.28,68.72 Q1.1 174.81,68.79 174.2,69.4 R45.2
N$16
  Top 2: D2.A 183,50 | 183,50 L1.2 | Q4.D 182.5,50.5 183,50
N$17
  Top 0.203: U7.1 104.8,64.95 104.55,64.7 102.9,64.7 101.35,63.15 101.35,61.15 99.9,59.7 98.95,59.7 98.33,59.08 U6.15
N$18
  Top 0.203: VR1.1
  Top 0.305: R11.1 VR1.1
N$19
  Top 0.406: R12.1 166,61.5 166.5,62 168.34,62 U3.8
N$20
  Top 0.406: R13.1 173.53,59.83 174.46,60.76 U3.1
N$21
  Top 0.203: 174,80.49 R14.2
  Top 0.305: VR1.3 179.42,76.58 175.51,80.49 174,80.49
N$22
  Top 0.203: U5.7 99.62,62 U6.1
N$23  (via drill 0.35)
  Top 0.305: U3.5 168.32,65.83 C11.1 169.6,68.6 170,69 v170,70 | VR1.2 178.58,80.58 v178,80
  Bottom 0.305: v178,80 170,72 v170,70
N$24
  Top 0.305: U3.3 172.47,64.53 171.83,65.17 C12.1
N$25
  Top 0.203: U5.6 98.35,62 U6.2
N$26
  Top 0.203: U5.5 97.06,66.28 U6.3
N$27
  Top 0.203: R31.1 29.65,61.25 24.55,56.15 U18.14
N$28
  Top 0.305: R22.1 119.27,65.43 U10.4
N$29
  Top 0.305: U11.4 123.77,65.43 R23.1
N$30
  Top 0.305: U12.4 128.27,65.43 R24.1
N$31
  Top 0.305: U13.4 132.77,65.43 R25.1
N$32
  Top 0.305: U14.4 137.27,65.43 R26.1
N$33
  Top 0.305: U15.4 141.77,65.43 R27.1
N$34
  Top 0.305: U16.4 146.27,65.43 R28.1
N$35
  Top 0.305: U17.4 150.77,65.43 R29.1
N$36
  Top 0.203: R30.2 116.7,57.32 U10.1
N$37  (via drill 0.35)
  Top 0.203: v22.9,52.6 19.7,52.6 19.3,52.2 19.3,48.2 18.1,47 R32.2 | v25.5,52.6 26.15,51.95 U18.6
  Bottom 0.203: v22.9,52.6 v25.5,52.6
N$38
  Top 0.203: R33.1 9.95,48.95 10.4,49.4 10.8,49.4 11,49.6 LED5.C
N$39
  Top 0.203: R33.2 R32.1
N$40
  Top 0.203: U6.4 95.81,62 U5.4
N$41
  Top 0.203: U5.3 94.54,62 U6.5
N$42
  Top 0.203: U6.6 93.25,66.28 U5.2
N$43
  Top 0.203: U5.1 91.97,66.28 U6.7
N$44  (via drill 0.35)
  Top 0.203: U6.9 90.7,57.7 v91,58 | U19.14 109.9,57.7 109.8,57.8 v109.3,57.8
  Bottom 0.203: v109.3,57.8 109.1,57.8 108.7,57.4 91.9,57.4 91.34,57.96 91.04,57.96 v91,58
N$45
  Top 0.203: U19.15 111.17,58.77 113.45,61.05 113.45,64.25 112.42,65.28 U7.7
N$46
  Top 0.203: U7.4 108.61,64.64 108.85,64.4 112.05,64.4 112.45,64 112.44,63.99 U19.1
N$47
  Top 0.203: U7.3 107.34,64.51 107.9,63.95 110.85,63.95 111.17,63.62 U19.2
N$48
  Top 0.203: U7.2 106.07,64.03 106.55,63.55 108.35,63.55 109.65,63.55 109.91,63.3 U19.3
N$49  (via drill 0.35)
  Top 0.203: U6.11 93.25,57.24 v94,58 | U19.11 106.09,57.2 v105.3,58 | U2.30 75.86,64.04 v75.9,64
  Bottom 0.203: v105.3,58 v94,58 92.18,58 90.58,59.6 89.7,59.6 87.8,61.5 87.8,63.2 87,64 v75.9,64
N$50  (via drill 0.35)
  Top 0.203: U21.15 86.97,61.08 v87,61.1 | v118.8,54.7 119.27,55.17 U10.3
  Bottom 0.203: v87,61.1 93.7,54.4 118.5,54.4 v118.8,54.7
N$51
  Top 0.203: U11.1 121.23,53.98 R34.2
N$52
  Top 0.203: U12.1 125.73,53.98 R35.2
N$53
  Top 0.203: U13.1 130.23,53.98 R36.2
N$54
  Top 0.203: U14.1 134.73,53.98 R37.2
N$55
  Top 0.203: U15.1 139.23,53.98 R38.2
N$56
  Top 0.203: U16.1 143.73,53.98 R39.2
N$57
  Top 0.203: U17.1 148.23,53.98 R40.2
N$58  (via drill 0.35)
  Top 0.203: U21.14 v87,59.8 | v122.9,54.4 123.77,55.27 U11.3
  Bottom 0.203: v122.9,54.4 122.5,54 93,54 87.2,59.8 v87,59.8
N$59  (via drill 0.35)
  Top 0.203: U21.13 86.97,58.53 v87,58.5 | v127.6,54.5 128.27,55.17 U12.3
  Bottom 0.203: v87,58.5 91.9,53.6 126.7,53.6 v127.6,54.5
N$60  (via drill 0.35)
  Top 0.203: U21.12 86.97,57.27 v87,57.3 | v131.9,54.4 132.77,55.27 U13.3
  Bottom 0.203: v131.9,54.4 130.6,53.1 91.2,53.1 87.1,57.2 v87,57.3
N$61  (via drill 0.35)
  Top 0.203: U21.11 v87,55.99 v87,56 | v136.5,54.4 137.27,55.17 U14.3
  Bottom 0.203: v87,56 90.3,52.7 134.8,52.7 v136.5,54.4
N$62  (via drill 0.35)
  Top 0.203: U21.10 87.17,54.73 v87.2,54.7 | v140.9,54.3 141.77,55.17 U15.3
  Bottom 0.203: v87.2,54.7 89.6,52.3 138.9,52.3 v140.9,54.3
N$63  (via drill 0.35)
  Top 0.203: U21.9 87.55,53.45 v88,53 | v145.5,54.3 146.27,55.07 U16.3
  Bottom 0.203: v145.5,54.3 143.1,51.9 89.1,51.9 v88,53
N$64  (via drill 0.35)
  Top 0.203: U21.7 81.28,54.73 v84,52 | v150.3,54.3 150.77,54.77 U17.3
  Bottom 0.203: v150.3,54.3 147.5,51.5 89.1,51.5 84.5,51.5 v84,52
N$65
  Top 0.305: J3.2 94,74.15 93.27,73.42 U5.15
N$66
  Top 0.305: U5.14 94.54,73.24 96,74.7 J3.3
N$67
  Top 0.305: J3.4 98,74.55 97.25,73.8 96.5,73.8 95.81,73.11 U5.13
N$68
  Top 0.305: U5.12 97.08,72.63 100,75.55 J3.5
N$69
  Top 0.305: U5.11 98.35,72.85 101.33,75.83 J3.6
N$70
  Top 0.305: J3.7 104.05,78.12 104.05,74.7 103.3,73.95 100.75,73.95 99.62,72.82 U5.10
N$71
  Top 0.305: J3.8 105.22,75.83 104.8,75.4 U7.16
N$72
  Top 0.305: U7.15 106.07,73.67 108,75.6 J3.9
N$73
  Top 0.305: J3.10 109.22,75.83 107.34,73.94 U7.14
N$74
  Top 0.305: R42.2 110.55,74.25 112,75.7 J3.11
N$75
  Top 0.305: J3.12 114.05,75.78 R43.2
N$76
  Top 0.406: U20.8 C26.1
N$77  (via drill 0.35)
  Top 0.203: v75.7,62.7 75.63,62.77 U2.29 | v94.5,50.89 94.5,55.82 U6.12 | U19.12 v107.36,50.9 v107.36,50.89
  Bottom 0.203: v75.7,62.7 77,61.4 77,52 79,50 93,50 | v107.36,50.89 106.47,50 93,50 | v94.5,50.89 93.61,50 93,50
N$78  (via drill 0.35)
  Top 0.203: U6.14 97.06,58.34 95.1,60.3 v92,60.3 | v75.8,65.3 U2.31
  Bottom 0.203: v92,60.3 89.8,60.3 88.9,61.2 88.9,63 88.9,64.1 87.7,65.3 v75.8,65.3
N$79
  Top 0.305: U7.13 108.61,73.26 R42.1
N$80
  Top 0.305: U7.10 112.42,73.43 R43.1
N$81
  Top 0.406: R44.2 162.7,54.7 163,55 163,58 | U3.7 164.25,63.26 163,62 163,58 | 164.4,58 165.08,58.68 R12.2 | 163,58 164.4,58 | 164.4,58 167,58 168.83,59.83 R13.2
  Top 1.8: R44.2 160.3,51.7 162,50 L1.1
N$82
  Top 0.203: U2.28 76.5,61.5 77.34,62.34 U21.1
N$83
  Top 0.203: U2.27 76.53,60.23 77.38,61.08 U21.2
N$84
  Top 0.203: U2.26 76.56,58.96 77.41,59.8 U21.3
N$85
  cutout Top: 158,58 158,42 200,42 200,82 179,82 179,75 189.76,75 189.76,68 182,68 182,63 178,63 178,58 169,58
  cutout Bottom: 158,61 158,42 200,42 200,82 169,82 169,74 169,72 171,74 189.76,74 189.76,68 182,68 182,63 178,63 178,61
N$86  (via drill 0.35)
  Top 0.203: R49.1 107,46.8 v107.4,47.2 | v129.2,49.7 129.3,49.6 C20.2
  Top 0.254: C20.2 130.05,48.35 132.4,46 SW4.2
  Bottom 0.203: v107.4,47.2 110.9,50.7 128.2,50.7 v129.2,49.7
N$87  (via drill 0.35)
  Top 0.203: C17.2 140.3,50 v139.7,50.6 | v100.8,46.8 100.77,46.77 R47.1
  Top 0.254: C17.2 141.05,48.45 143.5,46 SW3.2
  Bottom 0.203: v139.7,50.6 139.2,51.1 109.6,51.1 107.7,49.2 103.2,49.2 v100.8,46.8
N$88
  Top 0.3: N6.1 60.4,21.2 49.2,21.2 48,20 38.8,20 37.6,21.2 N7.1 37.2,21.6 35.6,23.2 24.4,23.2 22.8,21.6 14.8,21.6 N8.1 | N5.1 83.6,21.2 84.8,20 94,20 95.2,21.2 106.4,21.2 N4.1 106.8,21.2 114,21.2 116,23.2 127.6,23.2 129.2,21.6 N3.1 129.6,21.2 137.2,21.2 138.8,22.8 138.8,23.2 | N1.1 175.2,21.6 164.4,21.6 162.8,23.2 162,23.2 160.4,21.6 152.8,21.6 N2.1 152.4,21.6 141.6,21.6 140,23.2 138.8,23.2 | 138.8,23.2 138.8,24 129.2,33.6 108,33.6 J4.1
  Bottom 0.3: N6.1 60.8,21.6 68.8,21.6 70.4,23.2 81.6,23.2 83.2,21.6 N5.1
N$89  (via drill 0.35)
  Top 0.3: N7.3 36.4,16 27.2,16 26,17.2 15.2,17.2 14,16 N8.3 | N6.3 60,16 61.2,17.2 72,17.2 73.2,16 82.4,16 N5.3 82.8,16 92.4,16 93.6,17.2 94.8,17.2 96,16 105.6,16 N4.3 106,16 107.2,17.2 118,17.2 119.2,16 128.4,16 N3.3 | N1.3 174.4,16 165.2,16 164,17.2 153.2,17.2 152,16 N2.3 | v104,26.8 104,33.6 J4.3
  Bottom 0.3: v104,26.8 104,17.6 105.6,16 N4.3 | N2.3 151.6,16 142,16 140.8,17.2 130,17.2 128.8,16 N3.3 | N7.3 36.8,15.6 46.4,15.6 47.6,14.4 58.4,14.4 59.6,15.6 N6.3
N$90
  Top 0.254: C21.2 118.11,48 | 118.11,48 119.18,48 121.18,46 SW5.2 | R51.1 118.11,48
N$91  (via drill 0.35)
  Top 0.3: N4.4 107.6,13.6 108.8,14.8 116.4,14.8 117.6,13.6 130,13.6 N3.4 130.4,13.6 131.6,14.8 139.2,14.8 139.6,14.4 151.6,14.4 152.4,13.6 153.2,13.6 N2.4 | v99.6,36.4 102,36.4 J4.4 | N5.4 84,13.6 71.6,13.6 70.4,14.8 62.8,14.8 61.6,13.6 N6.4
  Bottom 0.3: N1.4 176,13.6 163.6,13.6 162.4,14.8 154.8,14.8 153.6,13.6 N2.4 | N8.4 15.6,13.6 16.8,14.8 24.4,14.8 25.6,13.6 38,13.6 N7.4 38.4,13.6 44.4,13.6 46,12 47.2,12 48.4,13.2 61.2,13.2 N6.4 61.2,13.6 61.2,16.4 60.4,17.2 58.8,17.2 58,18 58,21.2 74,37.2 94.4,37.2 95.2,36.4 v99.6,36.4 | N4.4 107.2,13.2 106.4,13.2 103.6,10.4 86.4,10.4 84.4,12.4 84.4,13.2 N5.4
N$92  (via drill 0.35)
  Top 0.3: N6.5 64.4,11.6 65.6,10.4 67.6,10.4 68.8,11.6 86.8,11.6 N5.5 87.2,11.6 88.4,11.6 89.6,10.4 108.8,10.4 110,11.6 N4.5 | v102.8,30.8 100,33.6 J4.5
  Bottom 0.3: N8.5 18.4,11.6 19.6,10.4 21.6,10.4 22.8,11.6 40.8,11.6 N7.5 41.2,11.6 42.4,10.4 46.8,10.4 48,11.6 64,11.6 N6.5 | N4.5 110.4,11.6 111.6,10.4 126.4,10.4 127.6,11.6 132.8,11.6 N3.5 133.2,11.6 134.4,11.6 135.6,10.4 154.8,10.4 156,11.6 N2.5 156.4,11.6 157.2,11.6 158.4,10.4 177.6,10.4 178.8,11.6 N1.5 179.2,12 179.2,13.2 187.2,21.2 187.2,22 178.4,30.8 v102.8,30.8
N$93  (via drill 0.35)
  Top 0.3: N6.7 69.6,13.6 63.6,13.6 62,12 48,12 46.8,13.2 N7.7 46.4,13.6 45.2,14.8 37.6,14.8 36.4,13.6 24,13.6 N8.7 | v96,28 96,33.6 J4.7 | N5.7 92.8,13.2 94,12 108,12 109.6,13.6 115.6,13.6 N4.7 116,13.2 116.8,13.2 119.6,10.4 136.4,10.4 139.2,13.2 | N1.7 184.4,13.2 184.4,12.4 182.4,10.4 165.6,10.4 162.8,13.2 162,13.2 N2.7 161.6,13.6 155.6,13.6 154,12 152.8,12 151.6,13.2 139.2,13.2 | 139.2,13.2 138.8,13.2 N3.7 139.2,13.2
  Bottom 0.3: v96,28 96,24.4 96.8,23.6 96.8,16.4 94,13.6 92.8,13.6 N5.7 | N6.7 70,13.2 82.4,13.2 86,9.6 105.6,9.6 109.6,13.6 115.6,13.6 N4.7
N$94
  Top 0.203: R46.1 LED6.A
N$95  (via drill 0.35)
  Top 0.3: N1.8 186,15.6 176.4,15.6 175.2,14.4 164.8,14.4 163.6,15.6 N2.8 | N3.8 140,15.6 130.4,15.6 129.2,14.4 118.8,14.4 117.6,15.6 N4.8 117.2,15.6 107.6,15.6 106.4,14.4 95.6,14.4 94.4,15.6 N5.8 94,15.6 93.2,15.6 92.4,14.8 83.6,14.8 83.2,14.4 72.8,14.4 71.6,15.6 N6.8 71.2,15.6 61.6,15.6 60.4,14.4 49.6,14.4 48.4,15.6 N7.8 | v94,28 94,36 J4.8
  Bottom 0.3: N2.8 163.2,15.6 153.6,15.6 152.4,14.4 141.6,14.4 140.4,15.6 N3.8 | v94,28 94,25.2 96,23.2 96,17.6 94.4,16 N5.8 | N8.8 25.6,16 34.8,16 36,17.2 46.8,17.2 48,16 N7.8
N$96  (via drill 0.35)
  Top 0.3: N1.9 186.4,18.4 176,18.4 174.8,17.2 165.2,17.2 164,18.4 N2.9 163.6,18.4 153.2,18.4 152,17.2 142,17.2 140.8,18.4 N3.9 140.4,18.4 130,18.4 128.8,17.2 119.2,17.2 118,18.4 N4.9 117.6,18.4 107.2,18.4 106,17.2 96,17.2 94.8,18.4 N5.9 94.4,18.4 93.6,18.4 92.4,17.2 82,17.2 80.8,18.4 72,18.4 N6.9 71.6,18.8 61.2,18.8 59.6,20.4 51.2,20.4 49.6,18.8 48.8,18.8 N7.9 | v92,28 92,33.6 J4.9
  Bottom 0.3: v92,28 92,26 95.2,22.8 95.2,19.2 94.8,18.8 N5.9 | N8.9 26,18.8 30.4,23.2 38,23.2 42.4,18.8 48.4,18.8 N7.9
N$97  (via drill 0.35)
  Top 0.3: N1.LHDP 183.2,23.6 181.2,25.6 162.4,25.6 160.4,23.6 N2.LHDP | v86,32.8 86,36 J4.12 | N5.LHDP 91.6,23.2 106.8,23.2 108,22 111.2,22 112.4,23.2 114,23.2 N4.LHDP 114.4,23.6 114.8,24 128.8,24 130.8,22 134.4,22 135.6,23.2 137.2,23.2 N3.LHDP | N7.LHDP 45.6,23.6 46.4,23.6 48,25.2 62.8,25.2 64,24 64,23.6 64.8,22.8 67.6,22.8 68,23.2 N6.LHDP
  Bottom 0.3: N3.LHDP 137.6,23.2 152.8,23.2 154,22 158.8,22 160,23.2 N2.LHDP | v86,32.8 89.2,29.6 89.2,28.8 88.8,28.4 88.8,26 91.2,23.6 N5.LHDP 91.2,23.2 90,22 85.2,22 83.2,24 70,24 69.6,23.6 68.4,23.6 N6.LHDP | N8.LHDP 22,23.2 20.4,23.2 19.2,22 16,22 15.2,22.8 15.2,24 17.6,26.4 42.4,26.4 45.2,23.6 N7.LHDP
N$98  (via drill 0.35)
  Top 0.3: v88,29.2 88,33.6 J4.11 | N7.RHDP 40,23.2 41.6,23.2 42.8,22 46,22 48,24 62,24 62.4,23.6 N6.RHDP | N4.RHDP 108.4,23.6 107.6,23.6 107.2,24 92.8,24 91.6,25.2 91.2,25.2 90,24 90,23.6 89.2,22.8 86.4,22.8 86,23.2 N5.RHDP
  Bottom 0.3: N1.RHDP 177.6,23.6 176.4,23.6 174.4,25.6 156.8,25.6 154.8,23.6 N2.RHDP 154.4,23.6 152.4,25.6 134,25.6 132,23.6 N3.RHDP 131.6,23.6 129.6,25.6 110.8,25.6 108.8,23.6 N4.RHDP | N7.RHDP 39.6,23.6 38.8,23.6 36.8,25.6 18.8,25.6 16.8,23.6 N8.RHDP | v88,29.2 88,25.6 86,23.6 N5.RHDP 85.6,23.6 83.6,25.6 64.8,25.6 62.8,23.6 N6.RHDP
N$99  (via drill 0.35)
  Top 0.3: N6.2 59.2,18.4 50.4,18.4 49.2,17.2 37.6,17.2 36.4,18.4 N7.2 | v106,26.8 106,36 J4.2
  Bottom 0.3: N6.2 59.6,18.4 60.4,18.4 61.6,17.2 72,17.2 73.2,18.4 82,18.4 N5.2 82.4,18.4 85.6,18.4 92,12 104,12 107.2,15.2 107.2,17.2 | N7.2 36,18.4 27.2,18.4 26,17.2 14.8,17.2 13.6,18.4 N8.2 | N1.2 174,18.4 165.2,18.4 164,17.2 152.8,17.2 151.6,18.4 N2.2 151.2,18.8 142.8,18.8 141.2,20.4 140.4,20.4 138.8,18.8 128.4,18.8 N3.2 128,18.4 119.2,18.4 118,17.2 107.2,17.2 | v106,26.8 106,23.2 104.8,22 104.8,19.2 105.2,18.8 N4.2 105.6,18.4 106.8,17.2 107.2,17.2
N$100  (via drill 0.35)
  Top 0.3: N8.6 21.2,11.6 22.4,10.4 41.6,10.4 42.8,11.6 43.6,11.6 N7.6 44,11.6 47.2,11.6 v48.4,10.4 64.4,10.4 65.2,9.6 110.8,9.6 112.8,11.6 N4.6 | v98,34 98,36 J4.6 | N2.6 159.2,11.6 163.2,11.6 165.2,9.6 182.8,9.6 186,12.8 186,14 185.2,14.8 184,14.8 182,12.8 182,12 N1.6
  Bottom 0.3: N5.6 89.6,12 86.8,14.8 83.6,14.8 83.2,14.4 70.8,14.4 70.4,14.8 68.8,14.8 67.2,13.2 67.2,12 N6.6 66.8,11.6 65.6,10.4 v48.4,10.4 | N2.6 158.8,12 158,12 156.4,13.6 155.6,13.6 154,12 136,12 N3.6 135.6,12 132.8,14.8 129.6,14.8 126.8,12 113.2,12 N4.6 | v98,34 176.4,34 188,22.4 188,18 187.2,17.2 185.6,17.2 182,13.6 182,12 N1.6
N$101  (via drill 0.35)
  Top 0.3: v90,28 90,36 J4.10 | N7.0 47.6,21.6 49.2,23.2 60.8,23.2 62.4,21.6 70.4,21.6 N6.0 70.8,21.6 72.4,23.2 83.6,23.2 85.2,21.6 93.2,21.6 N5.0 | v102.8,20 103.2,20.4 105.6,20.4 106,20 114,20 115.2,21.2 116.4,21.2 N4.0
  Bottom 0.3: N1.0 185.2,21.6 177.2,21.6 175.6,23.2 164.4,23.2 162.8,21.6 N2.0 162.4,21.2 161.2,20 152,20 150.8,21.2 139.6,21.2 N3.0 139.2,21.6 131.6,21.6 130,23.2 129.2,23.2 127.6,21.6 116.8,21.6 N4.0 | N5.0 93.2,21.6 93.2,23.6 90,26.8 v90,28 91.2,29.2 96.4,29.2 102.8,22.8 v102.8,20 | N8.0 24.4,21.2 16,21.2 14.8,20 14,20 12.8,21.2 12.8,22.8 17.2,27.2 43.6,27.2 47.2,23.6 47.2,21.6 N7.0
N$102  (via drill 0.35)
  Top 0.3: v84,36 84,34 J4.13
  Bottom 0.3: v84,36 94.4,36 102.4,28 176.8,28 180.4,24.4 N1.A
N$103
  Top 0.3: J4.14 82,36.4 82.8,36.4 84.4,38 143.6,38 157.2,24.4 N2.A
N$104
  Top 0.3: J4.15 80,33.6 81.6,33.6 88.4,26.8 102.4,26.8 103.6,25.6 107.6,25.6 108,26 132.8,26 134.4,24.4 N3.A
N$105
  Top 0.3: J4.16 78,36 78,33.2 85.2,26 102,26 103.2,24.8 108,24.8 108.4,25.2 110.4,25.2 111.2,24.4 N4.A
N$106
  Top 0.3: J4.17 76,33.6 84.4,25.2 87.6,25.2 88.4,24.4 N5.A
N$107
  Top 0.3: J4.18 74,36 74,32.8 65.6,24.4 N6.A
N$108
  Top 0.3: J4.19 72,33.6 52,33.6 42.8,24.4 N7.A
N$109
  Top 0.3: J4.20 70,36 31.2,36 19.6,24.4 N8.A
N$110
  Top 0.6: U20.1 38.15,49.5 C27.2
N$111  (via drill 0.35)
  Top 0.406: C27.1 36.85,51.25 v36.7,51.1 | D4.K 43.3,46.8 v43.7,47.2
  Top 0.6: U20.3 42.53,48.37 v43.7,47.2 L2.P$1
  Bottom 0.406: v36.7,51.1 36.7,48.8 38.3,47.2 v43.7,47.2
N$112
  Top 0.406: U20.5 43.8,56.1 44.2,56.5 R54.1 R55.2
N$113
  Top 0.203: C28.1 44.46,57.66 43.5,56.7 43,56.7 42.53,56.23 U20.6
N$114
  Top 0.203: C28.2 46.19,58.6 R56.2
RTS
  Top 0.203: Q2.E 1.68,58.99 2.44,59.75 4.06,59.75 4.39,59.42 U1.2 4.39,57.8 4.82,57.36 6.91,57.36 7.11,57.16 R8.2
RXD  (via drill 0.3, 0.35)
  Top 0.203: U1.4 5.66,60.21 7.11,61.67 v7.92,61.67 | v70.9,69.5 71.79,70.39 U2.35
  Bottom 0.203: v70.9,69.5 70.9,63.9 68.92,61.92 54,61.92 53.6,61.92 10.6,61.92 10.35,61.67 v7.92,61.67
SCL  (via drill 0.35)
  Top 0.203: R20.1 46.13,68.33 v46.4,68.6 | v70.2,71.2 70.66,71.66 U2.36 75.26,71.66 75.8,72.2 75.8,73.2 76.28,73.68 U9.4 | U4.8 77.5,65.09 v75.8,66.8
  Bottom 0.203: v46.4,68.6 67.6,68.6 v70.2,71.2 73.1,68.3 74.3,68.3 v75.8,66.8
SDA  (via drill 0.35)
  Top 0.203: U9.3 76.43,73.03 76.2,72.8 76.2,68.8 | 76.2,68.8 75.25,67.85 U2.33 72.05,67.85 71.4,67.2 v69.2,67.2 | v50.2,67.6 49.47,68.33 R21.1 | 76.2,68.8 76.2,67.7 77.53,66.36 U4.7
  Bottom 0.203: v69.2,67.2 50.6,67.2 v50.2,67.6
SW3  (via drill 0.35)
  Top 0.203: R47.2 97.74,46.82 R48.1 92.78,46.82 v92.7,46.9 | v66.6,58.5 v65.5,59.6 | v58,59.6 57.37,60.23 U2.12
  Bottom 0.203: v92.7,46.9 78.1,46.9 66.6,58.4 v66.6,58.5 | v65.5,59.6 58.2,59.6 v58,59.6
SW4  (via drill 0.35)
  Top 0.203: R49.2 104,46.85 R50.1 102.3,45.7 102,45.4 v101.1,45.4 | v58,58.6 57.6,58.6 57.24,58.96 U2.13
  Bottom 0.203: v58,58.6 64.7,58.6 77.9,45.4 v101.1,45.4
SW5  (via drill 0.35)
  Top 0.203: R52.1 110.62,47.98 v110.6,48 | v57.4,57.7 v57.39,57.69 U2.14
  Top 0.254: R52.1 112.98,48 R51.2
  Bottom 0.203: v110.6,48 107.4,44.8 77.4,44.8 64.5,57.7 v57.4,57.7
TXD  (via drill 0.3, 0.35)
  Top 0.203: U1.20 3.75,62.59 4.06,62.28 v4.88,62.28 | v70.3,68 71.52,69.22 73.9,69.22 U2.34
  Bottom 0.203: v4.88,62.28 68.28,62.28 70.3,64.3 v70.3,68
VBATT  (via drill 0.35)
  Top 0.203: R31.2 v38.55,61.25 | v52.6,65.7 51.7,64.8 v49.8,64.8 49.8,63.4 49.2,62.8 46.5,62.8 v45,61.3 | v69.3,65.9 v72,65.9 | v78,67.6 78.03,67.64 U4.6
  Bottom 0.203: v49.8,64.8 49.41,65.19 47.69,65.19 | v52.6,65.7 52.8,65.9 v69.3,65.9 | v72,65.9 76.3,65.9 v78,67.6 | v38.55,61.25 44.95,61.25 v45,61.3
VBUS  (via drill 0.3)
  Top 0.203: v7.11,74.67 v11.33,74.67 11.2,74.81 J1.VCC | v5.49,74.67 4.47,74.67 3.66,75.48 2.07,75.48 R15.2 | v18.69,71.62 18.83,71.48 R10.2
  Bottom 0.203: v7.11,74.67 v5.49,74.67 | v18.69,71.62 16.26,74.06 11.94,74.06 v11.33,74.67

## Text on the board
tPlace: IO0 | EN
_tNames: U2 | J1 | J3 | R14 | R45 | R11 | SW1 | SW2 | R17 | R18 | U9 | C18 | C19 | C12 | VR1 | R15 | R6 | R42 | R43 | C13 | Q1 | C14 | R10 | R1 | R46 | R5 | U4 | R16 | R2 | R3 | C5 | C22 | C10 | C6 | U5 | U7 | C11 | U3 | C4 | R4 | C7 | R22 | R24 | R25 | R26 | R27 | R28 | R29 | R23 | J2 | D1 | R20 | R21 | C3 | C8 | R12 | R31 | R56 | U19 | U1 | U6 | C23 | R53 | R44 | R13 | U18 | C28 | R19 | C26 | R54 | C30 | R7 | R8 | R55 | U10 | U11 | U12 | U13 | U14 | U15 | U16 | U17 | D3 | C29 | Q4 | C2 | C15 | C16 | U20 | U21 | R30 | R34 | R35 | R36 | R37 | R38 | R39 | R40 | Q2 | Q3 | C27 | R33 | R32 | C24 | R51 | C25 | R47 | R49 | D2 | R52 | L1 | D4 | R48 | R50 | C17 | L2 | C21 | C20
_bNames: BATT1